# Altium PCB CPLD_Breakout.PcbDoc
Units mil, origin at the board's own origin, x right, y up, seen from the top; angles counter-clockwise.
Board outline 2354 x 800 mil, 2 copper layers (Top Layer, Bottom Layer), stack 65.792 mil thick; 26 components, 43 nets, 146 pads, 74 vias.
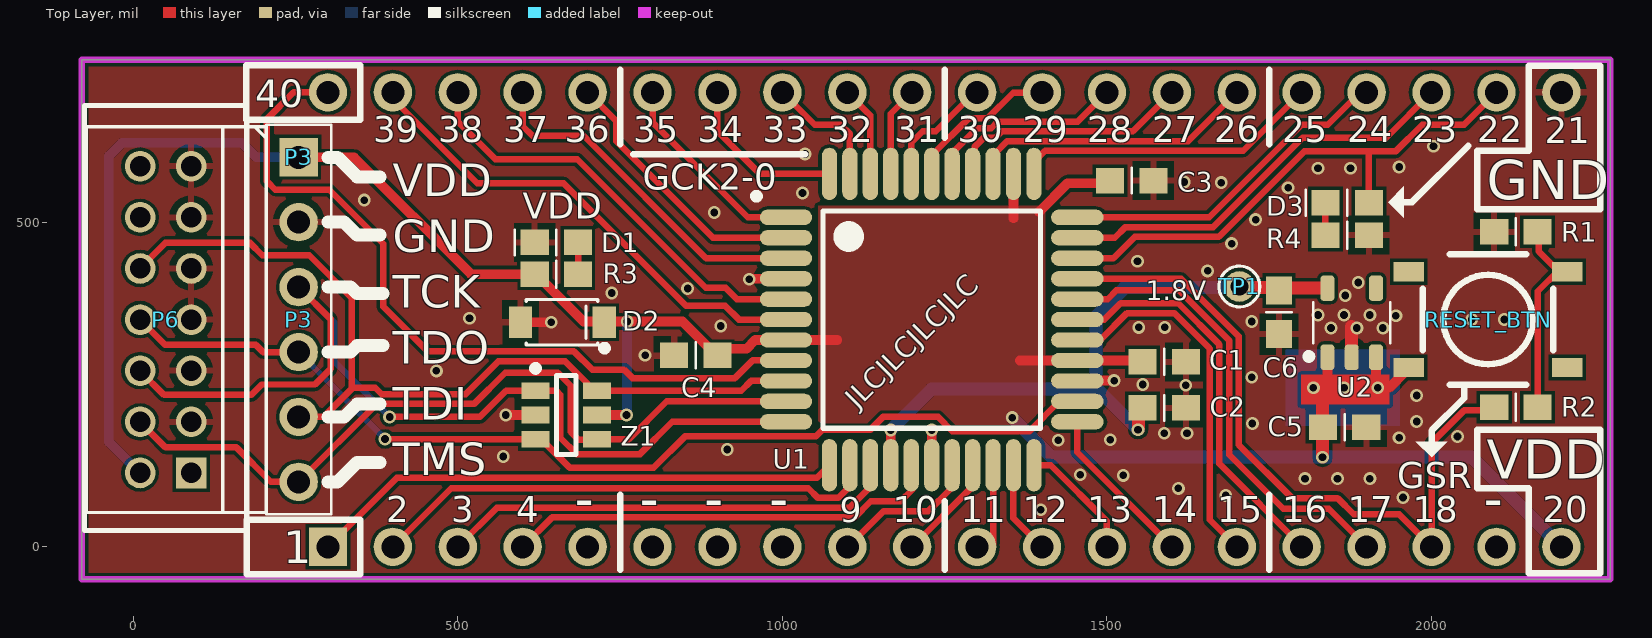
[diagram p0: Top Layer view]
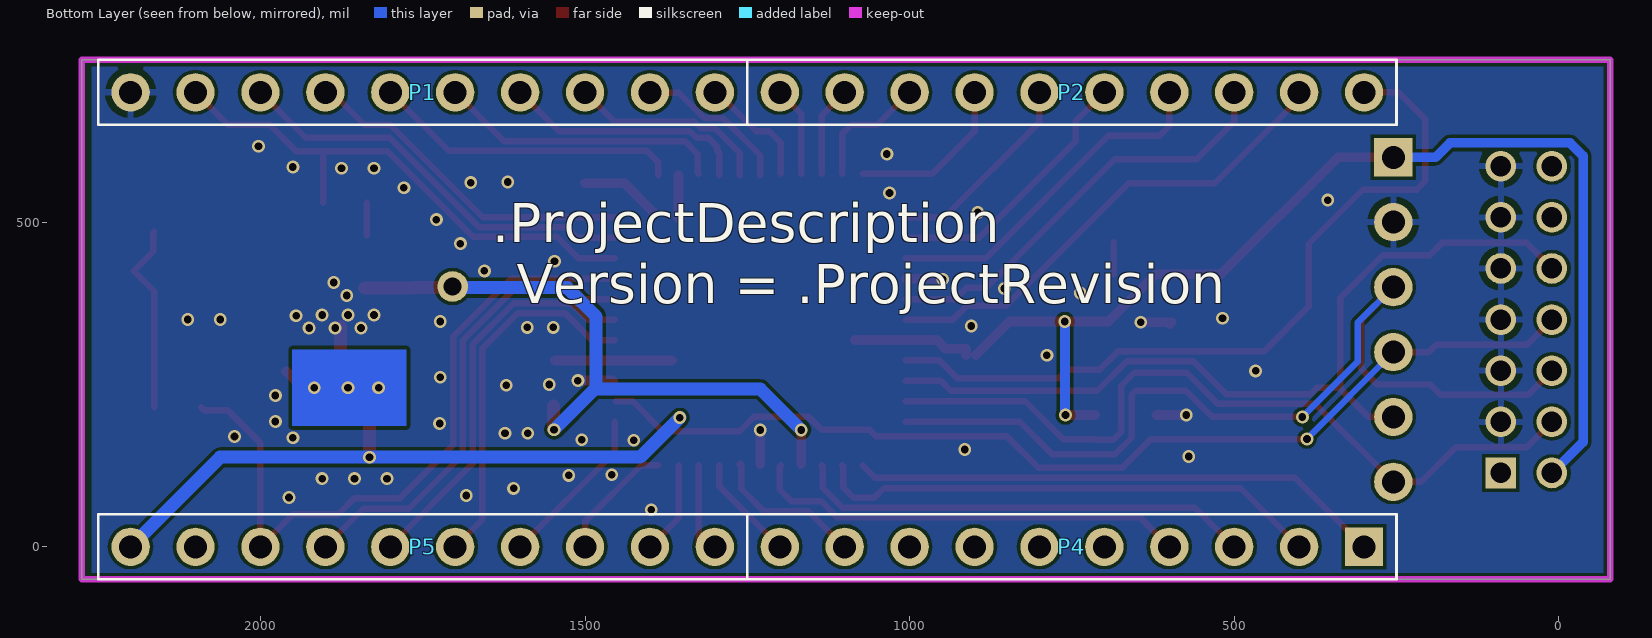
[diagram p1: Bottom Layer view, seen from below]
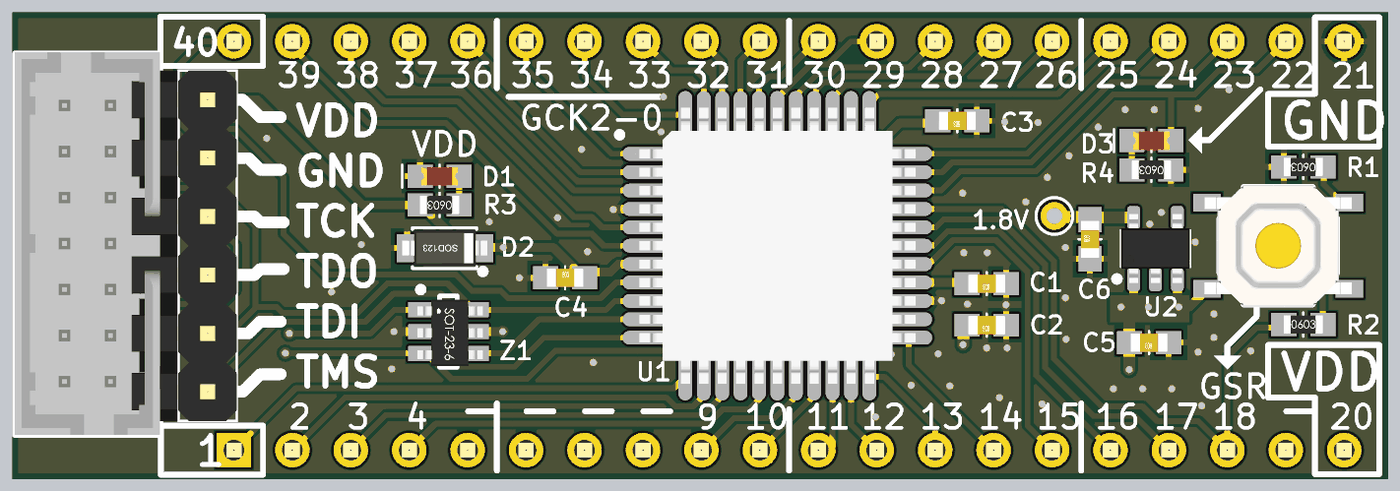
[diagram p2: 3D render of the assembled board from above, using the file's embedded part models]
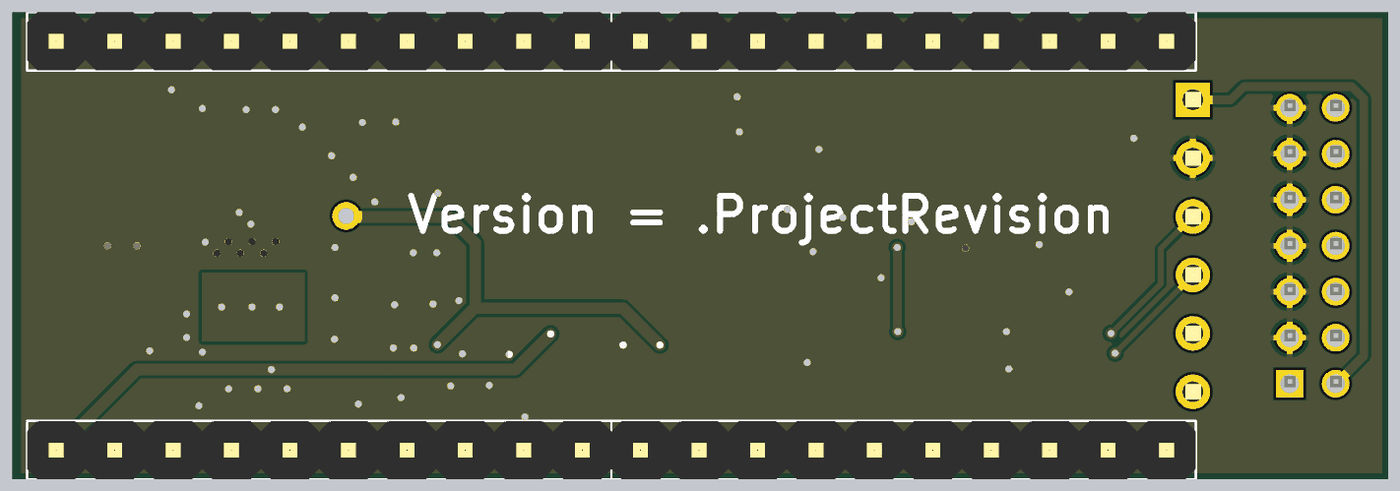
[diagram p3: 3D render of the assembled board from below, using the file's embedded part models]

## Layer stack, top to bottom
Top Solder: solder mask 0.4, Solder Resist, Dk 3.5
Top Layer: signal copper 1.4
Dielectric 1: dielectric 62.9921, FR-4, Dk 4.8
Bottom Layer: signal copper 1.4
Bottom Solder: solder mask 0.4, Solder Resist, Dk 3.5

## Board outline
-79,-50 -79,750 2275,750 2275,-50

## Design rules (kind name [scope] priority, off if disabled: settings)
Clearance [All] p1: gap=5 ignorepadtopadclearanceinfootprint=FALSE
HoleToHoleClearance [All] p1: gap=8 allowstackedmicrovias=TRUE
MinimumSolderMaskSliver [All] p1 off: minsoldermaskwidth=5
PolygonConnect PolygonConnect_Via [IsVia] p1: connectstyle=Direct reliefconductorwidth=10 reliefentries=4 polygonreliefangle="90 Angle" airgapwidth=10
PolygonConnect [All] p2: connectstyle=Relief reliefconductorwidth=10 reliefentries=4 polygonreliefangle="90 Angle" airgapwidth=10
RoomDefinition CPLD_Breakout [InComponentClass('CPLD_Breakout')] p1: confinementstyle=ConfineIn formatcopy=TRUE lockcomponents=FALSE outline -140,-125 2420,-125 2420,855 -140,855
RoutingVias [All] p1: holewidth=28 width=50 viastyle="Through Hole" minholewidth=28 minwidth=50 maxholewidth=28 maxwidth=50
SilkToSilkClearance [All] p1: silktosilkclearance=5
SilkToSolderMaskClearance [IsPad] p1: minsilkscreentomaskgap=5 clearancetoexposedcopper=TRUE
SolderMaskExpansion [All] p1: expansion=4
Width [All] p1: maxlimit=30 minlimit=10 preferedwidth=10
26 further rules are at their usual default settings.

## Components (designator, comment, footprint, x,y, rotation, side; value= is the part's Value field where it differs from the comment)
C1 "100nF" CCNP1608-0603 1588.19,285 r180 top
C2 "100nF" CCNP1608-0603 1588.19,214 r180 top
C3 "100nF" CCNP1608-0603 1538,564 r180 top
C4 "100nF" CCNP1608-0603 866.81,295 r0 top
C5 "2.2uF" CCNP1608-0603 1866,184.15 r180 top
C6 "2.2uF" CCNP1608-0603 1765,361.15 r90 top
D1 "LED Red" LED1608-0603-RED 652,469 r0 top
D2 "B5819W" SOD-123 661,346 r180 top
D3 "LED Red" LED1608-0603-RED 1870,530 r0 top
JLC_Serial_Number "JLC_Serial_Number" JLC_Serial_Number 1447,-219 r0 top
P1 "Header, 10-Pin" HDR1X10S#1 2200,700 r180 bottom
P2 "Header, 10-Pin" HDR1X10S#1 1200,700 r180 bottom
P3 "=Description" HDR1X6S 255,600 r270 top locked
P3 "Header, 6-Pin, Right Angle" HDR1X6H 255,600 r270 top locked
P4 "Header, 10-Pin" HDR1X10S#2 300,0 r0 bottom
P5 "Header, 10-Pin" HDR1X10S#1 1300,0 r0 bottom
P6 "XilinxJTAG" HEADER_2X7_2MM 50,350 r90 top locked
R1 "10K" CR1608-0603 2130,485 r180 top
R2 "10K" CR1608-0603 2130,215 r0 top
R3 "1K" CR1608-0603 652,420 r180 top
R4 "1K" CR1608-0603 1870,480 r180 top
RESET_BTN "SMD-SW-4_5.1x5.1x2.0_M" SMD-SW-4_5.1x5.1x2.0_M 2087,350 r0 top
TP1 "1.8V" "PCBPIN - 0.7mm" 1704,401 r0 top
U1 "XC2C64A-7VQG44C" VQG44_M 1230,350 r0 top locked
U2 "RT9198-18GBR" SOT23-5 1877,345.15 r270 top
Z1 "CM1293A-04SO" SOT457_N 667,203 r0 top

## Footprints (in the part's own frame and the unit in brackets; to place one, negate y for a bottom-side part, rotate by r counter-clockwise, add the part's x,y. Pads: shape width x height; smd on the part's side, far side on the other; paste and mask are expansions set on the pad)
CCNP1608-0603 [mm]
  rect 1.1x1 smd: 1(-0.85,0) 2(0.85,0)
  silkscreen extent 0,-0.5 0,0.5, body extent -0.8,-0.4 0.8,0.4, height 0.3
CR1608-0603 [mm]
  rect 1.1x1 smd: 1(-0.85,0) 2(0.85,0)
  silkscreen extent 0,-0.53 0,0.53, body extent -0.85,-0.4 0.85,0.4, height 0.56
HDR1X6H [mm] "Header; 6 Position; Right Angle"
  rect 1.5x1.5 hole 0.9: 1(0,0)
  round 1.5 hole 0.9: 2(2.54,0) 3(5.08,0) 4(7.62,0) 5(10.16,0) 6(12.7,0)
  silkscreen extent -1.19,-8.31 13.89,-1.27, body extent -1.27,-8.3 13.97,0.33, height 2.54
HDR1X6S [mil] "Header; 6 Position; Straight"
  silkscreen extent -50,-50 550,50, body extent -50,-50 550,50, height 236
HDR1X10S#1 [mm] "Header; 10 Position; Straight"
  round 1.5 hole 0.9: 1(0,0) 2(2.54,0) 3(5.08,0) 4(7.62,0) 5(10.16,0) 6(12.7,0) 7(15.24,0) 8(17.78,0) 9(20.32,0) 10(22.86,0)
  silkscreen extent -1.27,-1.27 24.13,1.27, body extent -1.27,-1.27 24.13,1.27, height 6
HDR1X10S#2 [mm] "Header; 10 Position; Straight"
  rect 1.5x1.5 hole 0.9: 1(0,0)
  round 1.5 hole 0.9: 2(2.54,0) 3(5.08,0) 4(7.62,0) 5(10.16,0) 6(12.7,0) 7(15.24,0) 8(17.78,0) 9(20.32,0) 10(22.86,0)
  silkscreen extent -1.27,-1.27 24.13,1.27, body extent -1.27,-1.27 24.13,1.27, height 6
HEADER_2X7_2MM [mm] "2x7 2mm Header"
  rect 1.2x1.2 hole 0.8: 1(-6,-1)
  round 1.2 hole 0.8: 2(-6,1) 3(-4,-1) 4(-4,1) 5(-2,-1) 6(-2,1) 7(0,-1) 8(0,1) 9(2,-1) 10(2,1) 11(4,-1) 12(4,1) 13(6,-1) 14(6,1)
  silkscreen extent -8.25,-3.18 8.38,3.18, body extent -8.23,-3.13 8.42,3.17, height 6.4
JLC_Serial_Number [mil]
LED1608-0603-RED [mm] "SMT-LED 0603"
  rect 1.1x1 smd: A(0.85,0) K(-0.85,0)
  silkscreen extent -1.62,-0.5 0,0.5, body extent -0.8,-0.4 0.8,0.4, height 0.7
"PCBPIN - 0.7mm" [mm]
  round 1.2 hole 0.7: 1(0,0)
  silkscreen extent -0.8,-0.8 0.8,0.8
SMD-SW-4_5.1x5.1x2.0_M [mm] "Miniature SMD PCB Push Button - C318888"
  rect 1.2x0.762 smd: 1(3.1,-1.875) 1b(-3.1,-1.875) 2(3.1,1.875) 2b(-3.1,1.875)
  silkscreen extent -2.55,-2.55 2.55,2.55, body extent -3.2,-2.65 3.2,2.65, height 2
SOD-123 [mm] "SOD-123; 2 Leads; Body 2.7 x 1.6 mm, (LxW)"
  rect 0.91x1.22 smd: A(1.64,0) K(-1.64,0)
  silkscreen extent -1.78,-0.89 1.41,1.14, body extent -1.85,-0.77 1.85,0.78, height 1.35
SOT23-5 [mm] "SOT-23; 5 Leads; Body 3.0 x 2.3 mm, inc. leads (LxW max)"
  rrect50% 1x0.55 smd: 1(1.35,-0.95) 2(1.35,0) 3(1.35,0.95) 4(-1.35,0.95) 5(-1.35,-0.95)
  silkscreen extent -0.8,-1.8 1.45,1.5, body extent -1.5,-1.5 1.5,1.5, height 1.45
SOT457_N [mm] "SOT23, 6-Leads, Body 2.9x1.5mm, Pitch 0.95mm, Lead Span 2.8mm, IPC Medium Density"
  rect 1.1x0.65 smd: 1(-1.2,0.95) 2(-1.2,0) 3(-1.2,-0.95) 4(1.2,-0.95) 5(1.2,0) 6(1.2,0.95)
  silkscreen extent -1.32,-1.55 0.38,1.95, body extent -1.34,-1.5 1.5,1.4, height 1.21
VQG44_M [mm] "Thin QFP, 44-Leads, Body 10x10mm, Pitch 0.8mm, IPC Low Density"
  oval 2.05x0.6 smd: 1(-5.7,4) 2(-5.7,3.2) 3(-5.7,2.4) 4(-5.7,1.6) 5(-5.7,0.8) 6(-5.7,0) 7(-5.7,-0.8) 8(-5.7,-1.6) 9(-5.7,-2.4) 10(-5.7,-3.2) 11(-5.7,-4) 23(5.7,-4) 24(5.7,-3.2) 25(5.7,-2.4) 26(5.7,-1.6) 27(5.7,-0.8) 28(5.7,0) 29(5.7,0.8) 30(5.7,1.6) 31(5.7,2.4) 32(5.7,3.2) 33(5.7,4)
  oval 0.6x2.05 smd: 12(-4,-5.7) 13(-3.2,-5.7) 14(-2.4,-5.7) 15(-1.6,-5.7) 16(-0.8,-5.7) 17(0,-5.7) 18(0.8,-5.7) 19(1.6,-5.7) 20(2.4,-5.7) 21(3.2,-5.7) 22(4,-5.7) 34(4,5.7) 35(3.2,5.7) 36(2.4,5.7) 37(1.6,5.7) 38(0.8,5.7) 39(0,5.7) 40(-0.8,5.7) 41(-1.6,5.7) 42(-2.4,5.7) 43(-3.2,5.7) 44(-4,5.7)
  silkscreen extent -6.98,-4.25 4.25,4.95, body extent -6.16,-6 6,6, height 1.24

## Part data
C1 C2 C3 C4: library part Cap_CCNP_0603, "Capacitor non-polar SMT 0603", LCSC=C14663, Manufacturer="Generic Components", Class=Passive, Published=08/06/2000, Publisher="Altium Hobart Technology Centre", SubClass=Capacitor
C5 C6: library part Cap, "Capacitor", LCSC=C23630, Manufacturer="Generic Components", Class=Passive, Published=08/06/2000, Publisher="Altium Hobart Technology Centre", SubClass=Capacitor
D1 D3: library part LED-0603-Red, "LED 0603 Red", LCSC=C2286, Manufacturer="Generic Components", Class I=Optoelectronic, Class II=LED, Farnell PN=1581239, Published=8-Jun-2000, Publisher="Altium Limited", Revision="July-2002: Re-released for DXP Platform."
D2: "Schottky diode1A 40V Vrm SOD-123", LCSC=C8598, Manufacturer="Generic Components", Class=Discrete, Published=08/06/2000, Publisher="Altium Hobart Technology Centre", SubClass="Diode - Switching"
P1 P2 P4 P5: library part "Header 1x10", LatestRevisionDate=17-Jul-2002, LatestRevisionNote="Re-released for DXP Platform.", Publisher="Altium Limited"
P3: library part "Header 1x6", "Header, 6-Pin", LatestRevisionDate=17-Jul-2002, LatestRevisionNote="Re-released for DXP Platform.", LCSC=*, Publisher="Altium Limited"
P3: library part "Header 1x6H", LatestRevisionDate=17-Jul-2002, LatestRevisionNote="Re-released for DXP Platform.", Publisher="Altium Limited"
R1 R2: library part Res_CR0603, "Resistor SMT 0603", LCSC=C25804, Manufacturer="Generic Components", Class=Passive, Published=08/06/2000, Publisher="Altium Hobart Technology Centre", SubClass=Resistor
R3 R4: library part Res_CR0603, "Resistor SMT 0603", LCSC=C21190, Manufacturer="Generic Components", Class=Passive, Published=08/06/2000, Publisher="Altium Hobart Technology Centre", SubClass=Resistor
RESET_BTN: library part SW_PB-TS, "Tactile Switch SPST 5.10mm X 5.10mm / (1.5mm=C318884) / (2.0mm=C318888) / (3.5mm=C318886)", LCSC=C318888, Revision=1.0
TP1: library part TP, "Test Point"
U1: library part XC2C64-7VQ44C, "CoolRunner-II 1.8V, 64 Macrocell CPLD, 33 User I/Os, 44-Pin VQFP, Commercial Grade, Pb-Free", Code_JEDEC=MS-026-ACB, DatasheetVersion="ver2.3, Nov-2008", Digikey=122-1410-ND, Farnell PN=2831286, PackageDescription="44-Pin Very Thin Quad Flat Pack (VQG44) - Pb-Free", PackageReference=VQG44, PackageVersion="ver1.2, Jun-2004"
U2: "1.8V 300mA LDO with enable, uses low ESR cap (ceramic)", LCSC=C130834, Digikey=RT9198-18GBR-ND, Farnell PN=2363142
Z1: "Ultra low capacitance quadruple rail-to-rail ESD protection", LCSC=C393377, Digikey=CM1293A-04SOOSCT-ND, Farnell PN=2533258
P6: Digikey=WM14809-ND

## Via types
v1: diameter 19.68, hole 11.81, Top Layer to Bottom Layer, tented both sides, 74 vias

## Nets (pads, with @x,y where several pads share a name; then routed paths per layer and width w, separated by ;. In a path a pad name is that pad's centre, name@x,y a point inside that pad or via, vN(x,y) a via of type N, cw(c..) or ccw(c..) an arc to the next point about the centre after c; other vN are vias at no path point)
1.8V: C2.2 C6.2 TP1.1 U1.15 U2.5 | length 971.9
  Top Layer w15: U1.15@1167.01,127.56 v1(1167.01,180)
  Top Layer w20: v1@1548.54,181.46 C2.2@1548.54,217 ; TP1.1@1723,399.15 1764.4,399.15 1765.25,398.3 U2.5
  Bottom Layer w20: v1(1167.01,180) 1230.01,243 1483,243 ; v1(1547.72,180.46) 1485.19,243 1483,243 ; TP1.1@1687,399.15 1527.15,399.15 1483,355 1483,243
3.3V: C1.2 C3.2 C4.2 C5.2 D2.K P3.1 P5.10 P6.2 R3.2 RESET_BTN.1b U1.7 U1.26 U1.35 U2.1 U2.3 Z1.5 | length 3513.5
  Top Layer w15: P3.1 340,600 520,420 R3.2 620.5,420 693.5,347 725.57,347 v1(761,347) 846.31,347 C4.2@898.31,295 ; Z1.5 v1(760,203) ; C4.2@913.31,295 913.31,305 944.61,305 958.11,318.5 U1.7 1084.5,318.5 ; 1355.98,506.02 U1.35@1355.98,572.44 ; 1366,287.01 U1.26 C1.2@1546.46,287.01 ; 1395,516 1439,560 C3.2@1500.54,560 ; v1@1826.6,245.55 v1@1827,245.15 ; 1839.6,245.55 U2.1 ; v1@1914.4,242.15 U2.3 ; v1@1918,243.15 1919.85,245 1935,245 1960,270 RESET_BTN.1b@1960.71,270 ; P5.10 P5.10@2202,2
  Top Layer w20: v1(1832,138) 1832,234
  Bottom Layer w15: P6.2@10.26,113.78 -37.5,161.54 -37.5,602.21 -17.37,622.34 167.66,622.34 190,600 P3.1 ; v1(760,203) 760.5,203.5 760.5,346.5 v1(761,347)
  Bottom Layer w20: v1(1354,199) 1415,138 v1(1832,138) 2062,138 P5.10
  other v1: 1818,245 1865,245 1917,245
B1_P2: P2.6 U1.2 | length 416.5
  Top Layer w10: P2.6 744,656 744,625 893.02,475.98 U1.2
B1_P3: P2.7 U1.3 | length 541.9
  Top Layer w10: P2.7 600,648 615,633 694,633 882.51,444.49 U1.3
B1_P5: P2.8 U1.5 | length 663.9
  Top Layer w10: P2.8 500,655 558,597 684,597 882,399 912.5,399 930,381.5 U1.5
B1_P6: P2.9 U1.6 | length 756.4
  Top Layer w10: P2.9 400,690 530,560 663,560 852,371 912,371 933,350 U1.6
B1_P8: P2.10 U1.8 | length 1200.1
  Top Layer w10: P2.10 247,700 206,659 206,563 219,550 302,550 385,467 385,370 454,301 679,301 707,273 756,273 769,260 927,260 954.01,287.01 U1.8
B1_P12: P4.1 U1.12 | length 824.5
  Top Layer w10: P4.1 406,106 1052.93,106 U1.12
B1_P13: P4.2 U1.13 | length 787.3
  Top Layer w10: P4.2 490,90 1040,90 1054.76,75.24 1086.24,75.24 1102.16,91.16 1102.16,123.74 U1.13
B1_P14: P4.3 U1.14 | length 706.9
  Top Layer w10: P4.3 560.24,60.24 1103.24,60.24 1133.66,90.66 1133.66,123.74 U1.14
B1_P16: P4.4 U1.16 | length 674.7
  Top Layer w10: P4.4 645.24,45.24 1111.45,45.24 1136.21,70 1182,70 1200,88 1200,124.09 U1.16
B1_P39: P1.9 U1.39 | length 240.7
  Top Layer w10: U1.39@1230,572.44 1230,603 1287.47,660.47 1316.37,660.47 1355.47,699.57 1399.57,699.57 P1.9
B1_P40: P1.10 U1.40 | length 181.5
  Top Layer w10: U1.40 1198.5,622.26 1216.24,640 1236.37,640 1296.37,700 P1.10
B1_P41: P2.1 U1.41 | length 139.3
  Top Layer w10: U1.41 1167.01,667.01 P2.1
B1_P42: P2.2 U1.42 | length 140.3
  Top Layer w10: P2.2 1135.51,664.49 U1.42
B2_P18: P4.9 U1.18 | length 238.6
  Top Layer w10: P4.9 1101.21,0 1156.21,55 1225,55 1259.27,89.27 1259.27,125.33 U1.18@1260.51,126.57 ; U1.18@1259.27,127.07 1259.64,127.44 U1.18@1260.51,126.57 ; U1.18 U1.18@1260.51,126.57 ; U1.18@1261.5,127.56 U1.18@1260.51,126.57
B2_P19: P4.10 U1.19 | length 164.1
  Top Layer w10: P4.10 1292.99,92.99 U1.19
B2_P20: P5.1 U1.20 | length 127.4
  Top Layer w10: P5.1@1320,0 1324.49,4.49 U1.20
B2_P21: P5.2 U1.21 | length 143.8
  Top Layer w10: U1.21 1355.98,44.02 P5.2
B2_P22: P5.3 U1.22 | length 187.4
  Top Layer w10: U1.22 1413.41,125.59 1500,39 P5.3
B2_P23: P5.4 U1.23 | length 262.8
  Top Layer w10: U1.23 1454.41,145.59 P5.4 P5.4@1600,-10
B2_P27: P5.5 U1.27 | length 566.3
  Top Layer w10: U1.27 1489.5,318.5 1531,360 1603.5,360 1658.16,305.35 1658.16,41.84 P5.5
B2_P28: P5.6 U1.28 | length 619.5
  Top Layer w10: U1.28 1496,350 1521,375 1609.72,375 1673.16,311.56 1673.16,127.84 1800,1 P5.6
B2_P29: P5.7 U1.29 | length 717.9
  Top Layer w10: U1.29 1501,381.5 1514.5,395 1610.93,395 1688.16,317.77 1688.16,141.84 1771.5,58.5 1841.5,58.5 P5.7
B2_P36: P1.6 U1.36 | length 444.3
  Top Layer w10: U1.36 1326.34,576.26 1326.34,604.81 1346.54,625 1625,625 P1.6
B2_P37: P1.7 U1.37 | length 383.6
  Top Layer w10: U1.37@1292.99,572.44 U1.37 1292.99,606.64 1296,609.65 1296,616 1309.73,629.73 1328.06,629.73 1338.33,640 1540,640 P1.7
B2_P38: P1.8 U1.38 | length 311.3
  Top Layer w10: U1.38@1261.5,572.44 U1.38 1261.5,606.5 1299.73,644.73 1321.84,644.73 1332.11,655 1455,655 P1.8
GCK0: P2.3 U1.43 | length 192.1
  Top Layer w10: P2.3 1050,650 1090,650 1104.02,635.98 U1.43
GCK1: P2.4 U1.44 | length 259.7
  Top Layer w10: P2.4 900,640 965.59,574.41 U1.44
GCK2: P2.5 U1.1 | length 312.3
  Top Layer w10: P2.5 800,654 946.52,507.48 U1.1
GND: C1.1 C2.1 C3.1 C4.1 C5.1 C6.1 D1.K D2.A P1.1 P3.2 P6.3 P6.5 P6.7 P6.9 P6.11 P6.13 R1.2 R4.1 U1.4 U1.17 U1.25 U2.2 Z1.2 | length 313.7
  Top Layer w10: U1.17@1229.05,126.54 U1.17 ; U1.25@1453.9,255 U1.25 1456.26,257.37 U1.25@1457.63,256
  Top Layer w15: v1(574,203) Z1.2 ; D2.A@599.43,343 D2.A v1(644,346) ; v1@949,412.99 U1.4 ; U1.17@1230,127.56 v1(1230,180) ; U1.25@1457.63,256 v1(1511,256)
  Top Layer w20: U2.2 v1@1877,339.15
  other v1: 1398,57 1956,76 1683,79 1610,90 1805,105 1855,105 1905,105 1525,110 1459,111 570,139 915,150 1425,164 1505,165 1950,168 2040,170 1588.19,175 1623.19,175 1724,190 1977,193 1977,233 1621.19,249 1555.19,250 1723,261 467,271 788.58,295 1845,337.15 1885,337.15 1925,337.15 1549,338 1589,338 905,340 1723,347 2062,350 2112,350 518,352 1945,356 1825,357.15 1865,357.15 1905,357.15 1867,387.15 737,391 854,398 1887,407.15 949,412 1655,425 1547,440 1692,467 1729,504 895,515 356,534 1031,545 1779,553 1676,561 1619,562 1825,583 1875,583 1950,585 1035,605 2003,617
GSR: P5.8 R2.1 U1.30 | length 1088.9
  Top Layer w10: U1.30 1614.15,412.99 1703.16,323.99 1703.16,156.84 1785,75 1855,75 1880,50 1950,50 P5.8 2000,160 2050,210 2086.54,210 R2.1@2091.54,215
GTS0: P1.4 U1.33 | length 525.3
  Top Layer w10: U1.33 1657.48,507.48 1800,650 1840,650 1890,700 P1.4
GTS1: P1.5 U1.34 | length 477.3
  Top Layer w10: U1.34@1387.48,572.44 1387.48,592.91 1404.57,610 1710,610 P1.5
GTS2: D3.A P1.2 U1.31 | length 831.1
  Top Layer w10: U1.31 1510,444.49 1542.99,477.48 1672.48,477.48 1804,609 1905,609 ; D3.A 1903.46,607.46 1905,609 ; P1.2 2050,650 1985.51,650 1944.51,609 1905,609
GTS3: P1.3 U1.32 | length 638.4
  Top Layer w10: U1.32 1512,475.98 1528.5,492.48 1663.69,492.48 1801.21,630 1930,630 P1.3
NetD1_A: D1.A R3.1 | length 49
  Top Layer w10: R3.1 D1.A
NetD3_K: D3.K R4.2 | length 50
  Top Layer w10: R4.2 D3.K
NetR1_1: R1.1 R2.2 RESET_BTN.2 | length 296.1
  Top Layer w10: R2.2 2163.46,393.46 2195,425 2165,455 2165,483.46 R1.1
TCK: P3.3 P6.6 U1.11 Z1.1 | length 1457.1
  Top Layer w10: P6.6@10.26,271.26 47.52,234 182,234 198,250 280,250 304,274 304,351 P3.3 ; v1(395,200) 534,200 574.4,240.4 Z1.1 620.16,240 652.14,240 658,234.14 658,168 683.2,142.8 780.8,142.8 830.52,192.52 U1.11
  Bottom Layer w10: P3.3 310,345 310,285 v1(395,200)
TDI: P3.5 P6.10 U1.9 Z1.6 | length 1336.4
  Top Layer w10: P6.10@10.26,428.74 49.52,468 180,468 199,449 271,449 337,383 337,244 ; P3.5 293,200 337,244 ; U1.9 951.73,255.51 936.61,240.4 Z1.6 710.81,240.4 665.71,285.5 562.5,285.5 512,235 383,235 373,245 338,245 337,244
TDO: P3.4 P6.8 U1.24 Z1.3 | length 1597.6
  Top Layer w10: P6.8@10.26,350 49.26,311 189,311 200,300 P3.4 ; v1(388,166) 628.21,166 672.21,122 802,122 850,170 1051.28,170 1061.28,180 1135,180 1155,200 1240,200 1261.84,178.16 1380.66,178.16 1426.52,224.02 U1.24@1452.44,224.02
  Bottom Layer w10: P3.4 255,299.5 388,166.5 v1(388,166)
TMS: P3.6 P6.4 U1.10 Z1.4 | length 1214
  Top Layer w10: P6.4@10.26,192.52 10.26,187.74 15.04,187.74 49.78,153 159,153 212,100 P3.6 375,220 525,220 573,268 654.22,268 674,248.22 674,177 686,165 Z1.4@713.65,165 ; Z1.4 763.6,165.6 822.02,224.02 U1.10
pads on no net: P4.5 P4.6 P4.7 P4.8 P5.9 P6.1 P6.12 P6.14 RESET_BTN.1 RESET_BTN.2b U2.4

## Polygon pours and split planes (outlines as drawn)
GND on Top Layer "Top Layer-GND" (solid, remove dead copper, pour order 4): 165,750 -79,750 -79,-50 162,-50 2285,-50 2285,750
3.3V on Top Layer "Top Layer-3.3V" (solid, pour order 2): 1055,525 1405,525 1405,175 1055,175
GND on Bottom Layer "Bottom Layer-GND" (solid, remove dead copper, pour order 0): 165,750 -79,750 -79,-50 165,-50 2260,-50 2260,750
no net on Top Overlay (solid): 668,74

## Keep-outs
Keep-Out Layer:
  lines w10: -79,-50 -79,750 165,750 2275,750 2275,-50 165,-50 -79,-50

## Other copper
Top Layer:
  rectangle net 3.3V: 1799,219.15 1935,265.15
Bottom Layer:
  rectangle net 3.3V: 1775,186 1951,304

## Silkscreen, mask and mechanical layers (free items; w line width, h text height)
Top Overlay:
  region: 1957,507 1933,531 1957,555
  region: 2024,162 2000,138 1976,162
  lines w10: 750,-35 750,80 ; 750,620 750,735 ; 770,605 1035,605 ; 1250,-35 1250,70 ; 1250,630 1250,735 ; 1750,-35 1750,80 ; 1750,620 1750,735 ; 1949,531 1970,531 2056.5,617.5 ; 2000,160 2000,179 2050,229 2050,249.61 ; 174,658 350,658 350,742 174,742 174,658 ; 175,-42 175,42 350,42 350,-42 175,-42 ; 2070,90 2150,90 2150,-41 2260,-41 2260,180 2070,180 2070,90 ; 2070,520 2260,520 2260,741 2150,741 2150,610 2070,610 2070,520
  lines w20: 300,100 315,100 345,130 380,130 ; 300,200 325,200 345,220 380,220 ; 300,300 335,300 345,310 385,310 ; 300,400 335,400 345,390 385,390 ; 300,500 325,500 345,480 380,480 ; 300,600 315,600 345,570 380,570
  text "40" at 188,677 h43
  text "39" at 370,623 h40
  text "38" at 470,623 h40
  text "37" at 570,623 h40
  text "36" at 665,623 h40
  text "35" at 770,623 h40
  text "34" at 870,623 h40
  text "33" at 970,623 h40
  text "32" at 1070,623 h40
  text "31" at 1172,623 h40
  text "30" at 1270,623 h40
  text "29" at 1370,623 h40
  text "28" at 1470,623 h40
  text "27" at 1570,623 h40
  text "26" at 1665,623 h40
  text "25" at 1770,623 h40
  text "24" at 1870,623 h40
  text "23" at 1970,623 h40
  text "22" at 2070,623 h40
  text "21" at 2174,622 h40
  text "GCK2-0" at 785,550 h40
  text "VDD" at 400,540 h50
  text "GND" at 2085,535 h60
  text "VDD" at 600,505 h40
  text "GND" at 400,454 h50
  text "TCK" at 400,368 h50
  text "TDO" at 400,282 h50
  text "TDI" at 400,196 h50
  text "TMS" at 400,110 h50
  text "VDD" at 2085,105 h60
  text "-" at 680,90 h60 r180
  text "-" at 780,90 h60 r180
  text "-" at 880,90 h60 r180
  text "-" at 980,90 h60 r180
  text "GSR" at 1947,90 h40
  text "-" at 2080,90 h60 r180
  text "2" at 390,38 h40
  text "3" at 490,38 h40
  text "4" at 590,38 h40
  text "9" at 1088,38 h39
  text "10" at 1170,38 h40
  text "11" at 1275,38 h40
  text "12" at 1370,38 h40
  text "13" at 1470,38 h40
  text "14" at 1570,38 h40
  text "15" at 1670,38 h40
  text "16" at 1770,38 h40
  text "17" at 1871,38 h40
  text "18" at 1971,38 h40
  text "20" at 2171,38 h40
  text "1" at 231,-25 h50
Bottom Overlay:
  text ".ProjectDescription" at 1643,469 h60
  text "Version = .ProjectRevision" at 1605,375 h60

## Dimensions
2275,750 to 2275,-50 on Mechanical 1
-79,750 to 2275,750 on Mechanical 1
2200,0 to 2200,700 on Mechanical 1

## Text inside footprints (layer, text, board x,y; h text height)
JLC_Serial_Number: Top Overlay "JLCJLCJLCJLC" at 1115,211 h31.5 r45